# Altium PCB PCB.PcbDoc
Units mm, origin at the board's own origin, x right, y up, seen from the top; angles counter-clockwise.
Board outline 75.31 x 50.01 mm, 2 copper layers (Top Layer, Bottom Layer); 115 components, 77 nets, 388 pads, 0 vias.
Unrouted connection lines stored in the file: 250.
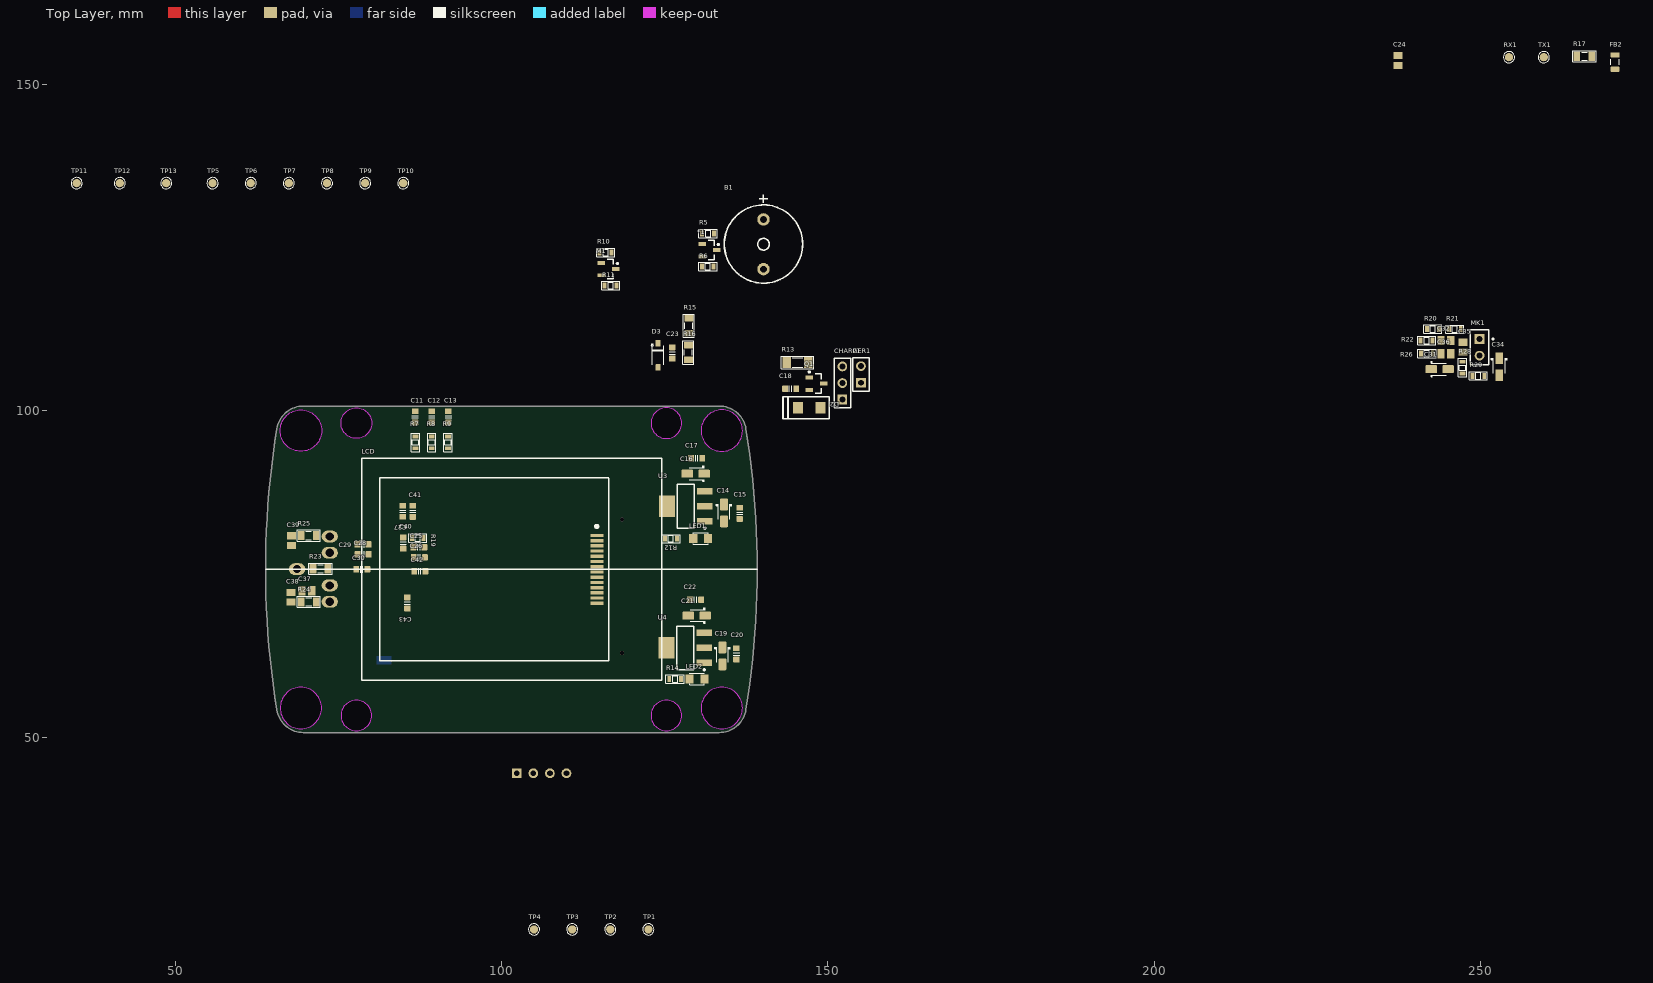
[diagram p0: Top Layer view]
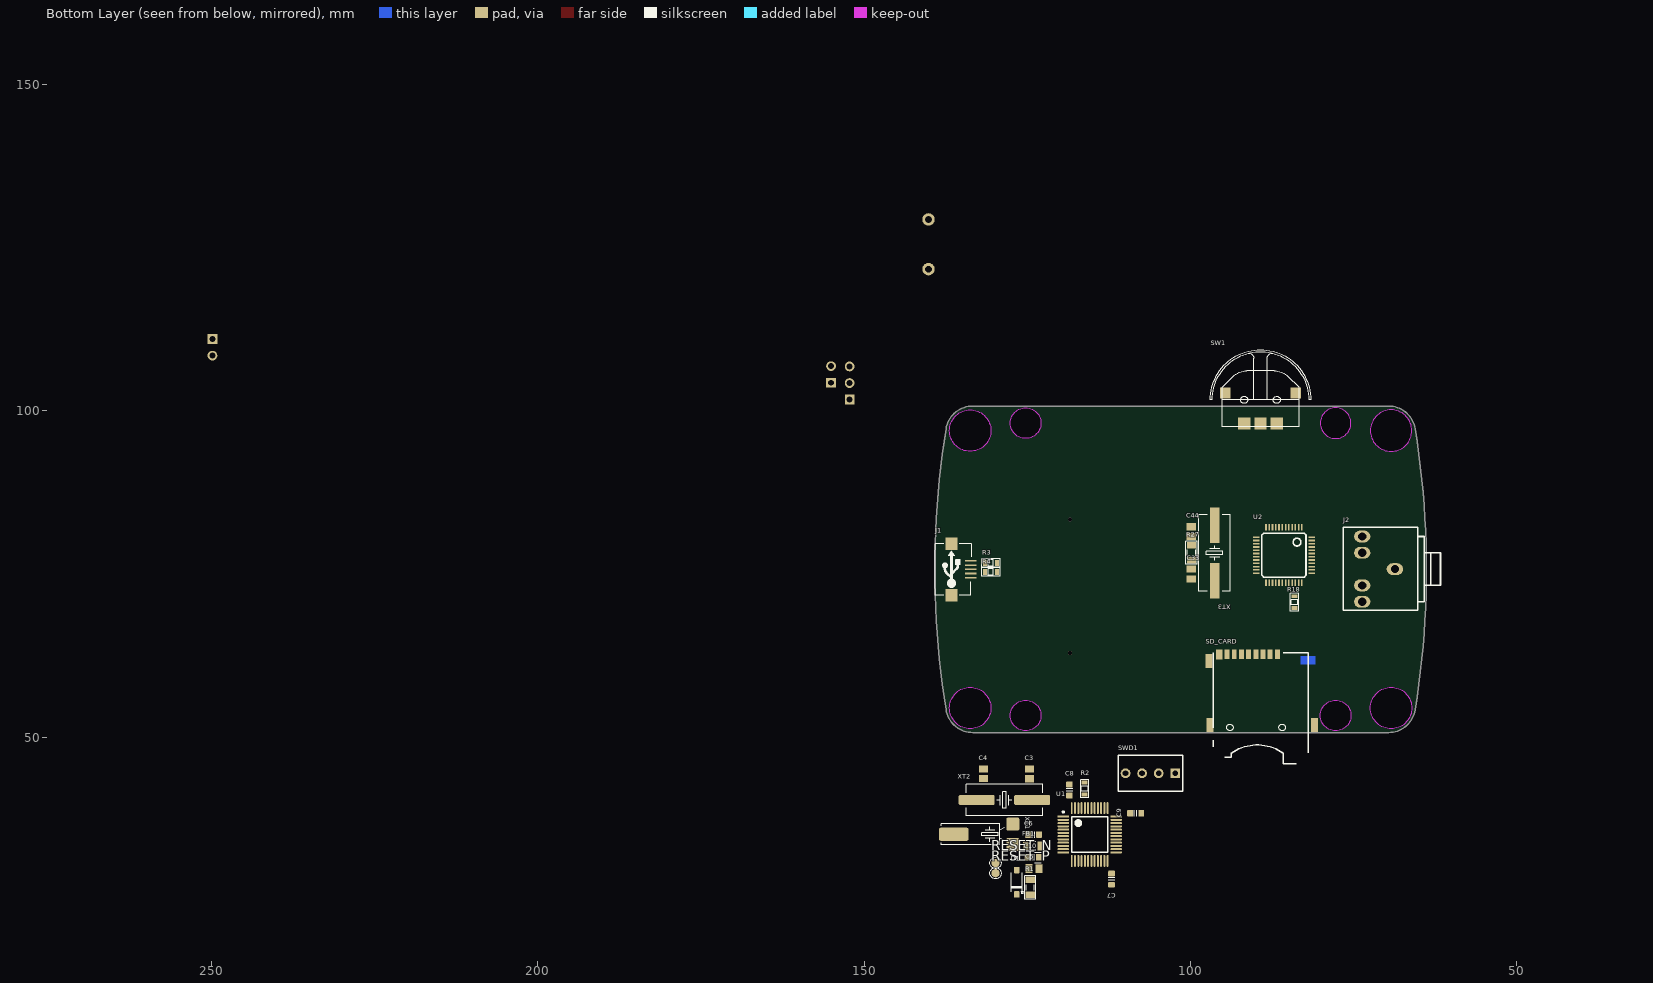
[diagram p1: Bottom Layer view, seen from below]

## Layer stack, top to bottom
Top Solder: solder mask 0.0102, Solder Resist, Dk 3.5
Top Layer: signal copper 0.0356
Dielectric 1: dielectric 0.32, FR-4, Dk 4.8
Bottom Layer: signal copper 0.0356
Bottom Solder: solder mask 0.0102, Solder Resist, Dk 3.5

## Board outline
69.673,50.697 75.401,50.697 98.596,50.697 104.395,50.697 124.324,50.697 133.388,50.696 ccw(c133.387,54.839) 137.477,54.184 ccw(c2.942,75.705) 137.477,97.224 ccw(c133.387,96.568) 133.388,100.711 127.665,100.71 104.468,100.71 98.669,100.71 75.472,100.71 69.673,100.711 ccw(c69.674,96.569) 65.585,97.224 ccw(c200.077,75.704) 65.584,54.188 ccw(c69.674,54.838)
cut-out: 69.281,93.779 cw(c69.281,96.954) 66.106,96.954 cw(c69.281,96.954) 69.281,100.129 cw(c69.281,96.954) 72.456,96.954 cw(c69.281,96.954)
cut-out: 75.431,53.304 ccw(c77.781,53.304) 77.781,50.954 ccw(c77.781,53.304) 80.131,53.304 ccw(c77.781,53.304) 77.781,55.654 ccw(c77.781,53.304)
cut-out: 66.106,54.454 ccw(c69.281,54.454) 69.281,51.279 ccw(c69.281,54.454) 72.456,54.454 ccw(c69.281,54.454) 69.281,57.629 ccw(c69.281,54.454)
cut-out: 122.931,53.304 ccw(c125.281,53.304) 125.281,50.954 ccw(c125.281,53.304) 127.631,53.304 ccw(c125.281,53.304) 125.281,55.654 ccw(c125.281,53.304)
cut-out: 130.606,54.454 ccw(c133.781,54.454) 133.781,51.279 ccw(c133.781,54.454) 136.956,54.454 ccw(c133.781,54.454) 133.781,57.629 ccw(c133.781,54.454)
cut-out: 130.606,96.954 ccw(c133.781,96.954) 133.781,93.779 ccw(c133.781,96.954) 136.956,96.954 ccw(c133.781,96.954) 133.781,100.129 ccw(c133.781,96.954)
cut-out: 122.931,98.104 ccw(c125.281,98.104) 125.281,95.754 ccw(c125.281,98.104) 127.631,98.104 ccw(c125.281,98.104) 125.281,100.454 ccw(c125.281,98.104)
cut-out: 77.781,95.754 cw(c77.781,98.104) 75.431,98.104 cw(c77.781,98.104) 77.781,100.454 cw(c77.781,98.104) 80.131,98.104 cw(c77.781,98.104)

## Design rules (kind name [scope] priority, off if disabled: settings)
Clearance [All] p1: gap=0.1
ComponentClearance [All] p1 off: gap=0.254 collisioncheckmode=3 verticalgap=0.254 showdistances=FALSE
Height [All] p1 off: minheight=0 maxheight=25.4 prefheight=12.7
PolygonConnect [All] p1: connectstyle=Relief reliefconductorwidth=0.254 reliefentries=4 polygonreliefangle="90 Angle" airgapwidth=0.254
RoutingVias [All] p1: holewidth=0.711 width=1.27 viastyle="Through Hole" minholewidth=0.711 minwidth=1.27 maxholewidth=0.711 maxwidth=1.27
SolderMaskExpansion [All] p1: expansion=0.102
Width [All] p1: maxlimit=0.254 minlimit=0.254 preferedwidth=0.254
28 further rules are at their usual default settings.

## Classes and differential pairs
component class vs1003: C24 C25 C26 C27 C28 C29 C30 C31 C32 C33 C34 C35 C36 C37 C38 C39 C40 C41 C42 C43 C44 FB2 J2 MK1 R17 R18 R19 R20 R21 R22 R23 R24 R25 R26 R27 R28 R29 RX1 TX1 U2 XT3
component class psu: C14 C15 C16 C17 C18 C19 C20 C21 C22 C23 CHARGER1 D2 D3 LED1 LED2 P1 Q1 R12 R13 R14 R15 R16 TP5 TP6 TP7 TP8 TP9 TP10 TP11 TP12 TP13 U3 U4
component class multimedia: *1 B1 C11 C12 C13 LCD M1 R5 R6 R7 R8 R9 R10 R11 SD_CARD SW1
component class mcu: C3 C4 C5 C6 C7 C8 C9 C10 D1 FB1 J1 R1 R2 R3 R4 RESET_N RESET_P SWD1 TP1 TP2 TP3 TP4 U1 XT1 XT2

## Components (designator, comment, footprint, x,y, rotation, side; value= is the part's Value field where it differs from the comment)
*1 "2n7002" SOT23_N 131.89,124.61 r0 top
B1 "Buzzer" Buzzer1 140.16,129.31 r270 top
C3 "Cap Semi" C0805 124.7,44.36 r270 bottom
C4 "Cap Semi" C0805 131.74,44.38 r270 bottom
C5 "Cap Semi" C0805 123.99,29.86 r180 bottom
C6 "approved sub OK" CAPC1608X90N 124.07,35.05 r0 bottom
C7 "approved sub OK" CAPC1608X90N 112.12,28.23 r270 bottom
C8 "approved sub OK" CAPC1608X90N 118.57,41.9 r90 bottom
C9 "approved sub OK" CAPC1608X90N 108.42,38.34 r180 bottom
C10 "approved sub OK" CAPC1608X90N 124.12,31.59 r180 bottom
C11 "Cap Semi" CAPC1608X90N 86.77,99.07 r270 top
C12 "Cap Semi" CAPC1608X90N 89.33,99.07 r270 top
C13 "Cap Semi" CAPC1608X90N 91.89,99.07 r270 top
C14 "10µ" CAPMP3216X180N 134.11,84.34 r270 top
C15 "Cap Semi" CAPC1608X90N 136.5,84.28 r90 top
C16 "10µ" CAPMP3216X180N 129.77,90.36 r180 top
C17 "Cap Semi" CAPC1608X90N 129.926,92.704 r0 top
C18 "Cap Semi" CAPC1608X90N 144.32,103.35 r0 top
C19 "10µ" CAPMP3216X180N 133.86,62.436 r270 top
C20 "Cap Semi" CAPC1608X90N 136.01,62.75 r90 top
C21 "10µ" CAPMP3216X180N 129.93,68.62 r180 top
C22 "Cap Semi" CAPC1608X90N 129.75,71.04 r0 top
C23 "Cap Semi" CAPC1608X90N 126.186,108.846 r90 top
C24 "Cap Semi" C0805 237.363,153.67 r90 top
C25 "approved sub OK" CAPC1608X90N 87.36,79.08 r180 top
C26 "approved sub OK" CAPC1608X90N 87.42,77.52 r180 top
C27 "approved sub OK" CAPC1608X90N 84.89,84.6 r90 top
C28 "approved sub OK" CAPC1608X90N 78.81,78.01 r180 top
C29 "approved sub OK" CAPC1608X90N 78.8,79.52 r180 top
C30 "approved sub OK" CAPC1608X90N 78.61,75.69 r180 top
C31 "10µ" CAPMP3216X180N 243.76,106.37 r0 top
C32 "Cap Semi" C0805 244.72,110.78 r0 top
C33 "Cap Semi" C0805 99.9,74.98 r90 bottom
C34 "10µ" CAPMP3216X180N 252.89,106.73 r270 top
C35 "Cap Semi" C0805 247.31,109.73 r90 top
C36 "Cap Semi" C0805 244.71,108.74 r0 top
C37 "Cap Semi" C0805 70.19,72.42 r0 top
C38 "Cap Semi" C0805 67.79,71.42 r270 top
C39 "Cap Semi" C0805 67.84,80.09 r90 top
C40 "approved sub OK" CAPC1608X90N 84.96,79.73 r270 top
C41 "approved sub OK" CAPC1608X90N 86.43,84.59 r90 top
C42 "approved sub OK" CAPC1608X90N 87.5,75.4 r180 top
C43 "approved sub OK" CAPC1608X90N 85.59,70.56 r270 top
C44 "Cap Semi" C0805 99.91,81.48 r270 bottom
CHARGER1 "3-Pin connector" HDR1X3 152.24,101.7 r90 top
D1 "DIODE_SCHOTTKY_40V_1A" SOD123 126.635,27.75 r90 bottom
D2 "Diode" "SMD Diode" 147.19,100.45 r0 top
D3 "DIODE_SCHOTTKY_40V_1A" SOD123 124,108.48 r270 top
FB1 "2K2 @ 100 MHz" FBC2012N 124.17,33.32 r180 bottom
FB2 "2K2 @ 100 MHz" FBC2012N 270.637,153.416 r90 top
J1 "USB-5" USB-M1 133.67,75.7 r90 bottom
J2 "Jack Stereo 5pin" "Audio Jack 5 pin" 71.501,75.736 r270 bottom locked
LCD "LCD_JD-T1800" JD-T1800 124.584,58.694 r90 top locked
LED1 "LED" LED-0805-Red 129.384,80.4 r0 top
LED2 "LED" LED-0805-Red 128.83,58.91 r0 top
M1 "2n7002" SOT23_N 116.42,121.71 r0 top
MK1 "Mic2" PIN2 249.88,110.98 r270 top
P1 "BAT_CON" HDR1X2 155.09,104.29 r90 top
Q1 "IRLML6402" SOT-23B_N 148.3,104.15 r0 top
R1 "Res" RES-SMD-0805 124.575,26.96 r90 bottom
R2 "Res" RES-SMD-0603 116.23,42.08 r90 bottom
R3 "Res" RES-SMD-0603 130.6,76.65 r180 bottom
R4 "Res" RES-SMD-0603 130.6,75.27 r180 bottom
R5 "Res" RES-SMD-0603 131.66,127.16 r180 top
R6 "Res" RES-SMD-0603 131.64,122.08 r180 top
R7 "Res" RES-SMD-0603 86.84,95.14 r90 top
R8 "Res" RES-SMD-0603 89.335,95.14 r90 top
R9 "Res" RES-SMD-0603 91.83,95.14 r90 top
R10 "Res" RES-SMD-0603 115.99,124.24 r180 top
R11 "Res" RES-SMD-0603 116.75,119.17 r180 top
R12 "Res" RES-SMD-0603 125.98,80.4 r0 top
R13 "Res" RES-SMD-1206 145.38,107.39 r180 top
R14 "Res" RES-SMD-0603 126.61,58.89 r0 top
R15 "Res" RES-SMD-0805 128.72,113.02 r270 top
R16 "Res" RES-SMD-0805 128.64,108.92 r270 top
R17 "Res" RES-SMD-0805 265.938,154.305 r0 top
R18 "Res" RES-SMD-0603 84.07,70.65 r90 bottom
R19 "Res" RES-SMD-0603 87.17,80.48 r0 top
R20 "Res" RES-SMD-0603 242.72,112.51 r0 top
R21 "Res" RES-SMD-0603 246.06,112.5 r0 top
R22 "Res" RES-SMD-0603 241.78,110.77 r180 top
R23 "Res" RES-SMD-0805 72.28,75.78 r180 top
R24 "Res" RES-SMD-0805 70.49,70.72 r180 top
R25 "Res" RES-SMD-0805 70.47,80.87 r180 top
R26 "Res" RES-SMD-0603 241.81,108.78 r180 top
R27 "Res" RES-SMD-0805 99.87,78.23 r90 bottom
R28 "Res" RES-SMD-0603 247.25,106.62 r270 top
R29 "Res" RES-SMD-0603 249.67,105.35 r0 top
RESET_N "TESTPOINT" TP-R60 129.89,30.71 r90 bottom
RESET_P "TESTPOINT" TP-R60 129.89,29.14 r90 bottom
RX1 "TESTPOINT" TP-R60 254.381,154.178 r0 top
SD_CARD "USD-SOCKETUSD" MICROSD-CARD 89.783,45.89 r180 bottom locked
SW1 "Navigation Switch" "Navigation Switch" 91.79,98.06 r180 bottom locked
SWD1 "Header4" HDR4 102.35,44.45 r0 bottom
TP1 "TESTPOINT" TP-R60 122.525,20.53 r0 top
TP2 "TESTPOINT" TP-R60 116.683,20.53 r90 top
TP3 "TESTPOINT" TP-R60 110.841,20.53 r90 top
TP4 "TESTPOINT" TP-R60 104.999,20.53 r90 top
TP5 "TESTPOINT" TP-R60 55.753,134.874 r90 top
TP6 "TESTPOINT" TP-R60 61.595,134.874 r90 top
TP7 "TESTPOINT" TP-R60 67.437,134.874 r90 top
TP8 "TESTPOINT" TP-R60 73.279,134.874 r90 top
TP9 "TESTPOINT" TP-R60 79.121,134.874 r90 top
TP10 "TESTPOINT" TP-R60 84.963,134.874 r90 top
TP11 "TESTPOINT" TP-R60 34.925,134.874 r90 top
TP12 "TESTPOINT" TP-R60 41.529,134.874 r90 top
TP13 "TESTPOINT" TP-R60 48.641,134.874 r90 top
TX1 "TESTPOINT" TP-R60 259.715,154.178 r0 top
U1 "STM32F103C8T6" LQFP48_N 115.46,35.07 r180 bottom
U2 "VS1003-LQFP48" LQFP48 85.7,77.87 r0 bottom
U3 "LM1117-3.3V" SOT230P700X180-4N 128.27,85.36 r180 top
U4 "LM1117-2.5V" SOT230P700X180-4N 128.19,63.666 r180 top
XT1 "32,768 KHz" CRYSTAL_CMR309T 129.24,35.11 r180 bottom
XT2 "8.00MHz" CRYSTAL_HC49-US-SM 128.53,40.35 r180 bottom
XT3 "12.288MHz" CRYSTAL_HC49-US-SM 96.31,78.2 r270 bottom

## Footprints (in the part's own frame and the unit in brackets; to place one, negate y for a bottom-side part, rotate by r counter-clockwise, add the part's x,y. Pads: shape width x height; smd on the part's side, far side on the other; paste and mask are expansions set on the pad)
"Audio Jack 5 pin" [mm]
  oval 1.8x2.5 hole 1.25: 1(0,2.794) 2(5,-2.206) 3(-5,-2.206) 4(2.5,-2.206) 5(-2.5,-2.206)
  silkscreen extent -6.4,-5.13 6.3,9.79, body extent -6,-4.98 6,9.07, height 5.5
Buzzer1 [mil]
  round 75 hole 40: 1(0,0) 2(300,0)
  silkscreen extent -150,-236 385,236
C0805 [mm] "Chip Capacitor, Body 2.0x1.3mm, IPC High Density"
  rect 1.1x1.4 smd: 1(-0.75,0) 2(0.75,0)
  body extent -1.1,-0.72 1.1,0.72, height 1.4
CAPC1608X90N [mm] "Chip Capacitor, Body 1.6x0.8mm, EIA 0603, IPC Medium Density"
  round 0.254 on Mech15: 0(0,0)
  rrect25% 0.9x1 smd: 1(-0.85,0) 2(0.85,0)
  Top Layer pour cut-out: -0.6,0.5 -0.4,0.7 0.4,0.7 0.6,0.5 0.6,-0.5 0.4,-0.7 -0.4,-0.7 -0.6,-0.5
  silkscreen extent -0.18,-0.48 0.18,0.48, body extent -0.85,-0.45 0.85,0.45, height 0.89
CAPMP3216X180N [mm] "Capacitor, polarized, Molded Body, EIA 535BAAC size A; 3.20mm L X 1.60mm W X 1.80mm H"
  round 0.508 on Mech15: 0(0,0)
  rrect25% 1.8x1.2 smd: 1(-1.3,0) 2(1.3,0)
  silkscreen extent -1.3,-1.2 1,1.2, body extent -1.6,-0.8 1.6,0.8, height 1.8
CRYSTAL_CMR309T [mm] "SMD Crystal CMR309T package"
  round 0.508 on Mech15: 0(0,0)
  rrect25% 2x2 smd: 1(2,-1.55) 2(2,1.55)
  rrect25% 4.5x2 smd: SH(-7.05,0)
  silkscreen extent -9,-1.6 0.72,1.6, body extent -9,-2.25 2.73,2.25, height 3.09
CRYSTAL_HC49-US-SM [mm] "SMD Crystal HC49/US-SM package"
  round 0.508 on Mech15: 0(0,0)
  rrect25% 5.5x1.5 smd: 1(-4.25,0) 2(4.25,0)
  silkscreen extent -5.84,-2.41 5.84,2.41, body extent -6.4,-2.41 6.4,2.42, height 4.29
FBC2012N [mm] "Ferrite Bead Chip, Body 2.0x1.2mm, 0805, IPC Medium Density"
  round 0.508 on Mech15: 0(0,0)
  rrect25% 0.8x1.35 smd: 1(-1.1,0) 2(1.1,0)
  silkscreen extent -0.43,-0.64 0.46,0.64, body extent -1,-0.62 1,0.63, height 0.9
HDR1X2 [mm] "Connector; Header; 2 Position"
  rect 1.5x1.5 hole 0.9: 1(0,0)
  round 1.5 hole 0.9: 2(2.54,0)
  silkscreen extent -1.27,-1.27 3.81,1.27
HDR1X3 [mm] "Connector; Header; 3 Position"
  rect 1.5x1.5 hole 0.9: 1(0,0)
  round 1.5 hole 0.9: 2(2.54,0) 3(5.08,0)
  silkscreen extent -1.27,-1.27 6.35,1.27
HDR4 [mm] "Connector; Header; 4 Position"
  rect 1.5x1.5 hole 0.9: 1(0,0)
  round 1.5 hole 0.9: 2(2.54,0) 3(5.08,0) 4(7.62,0)
  silkscreen extent -1.14,-2.79 8.76,2.74, body extent -1.27,-2.92 8.89,2.88, height 11.72
JD-T1800 [mm]
  round 0.6 hole 0.6: 1(4.2,6.1) 1(24.65,6.1)
  rect 0.5x2 smd: 1(22.2,9.9) 2(21.4,9.9) 3(20.6,9.9) 4(19.8,9.9) 5(19,9.9) 6(18.2,9.9) 7(17.4,9.9) 8(16.6,9.9) 9(15.8,9.9) 10(15,9.9) 11(14.2,9.9) 12(13.4,9.9) 13(12.6,9.9) 14(11.8,9.9)
  silkscreen extent 0,0 34,46
LED-0805-Red [mil]
  rect 50x55 smd: 1(0,0) 2(90,0)
  silkscreen extent 0,-35 90,35, body extent 5,-25 85,25, height 43
LQFP48 [mm]
  rect 0.25x1 smd: 1(-2.75,-4.25) 2(-2.25,-4.25) 3(-1.75,-4.25) 4(-1.25,-4.25) 5(-0.75,-4.25) 6(-0.25,-4.25) 7(0.25,-4.25) 8(0.75,-4.25) 9(1.25,-4.25) 10(1.75,-4.25) 11(2.25,-4.25) 12(2.75,-4.25) 25(2.75,4.25) 26(2.25,4.25) 27(1.75,4.25) 28(1.25,4.25) 29(0.75,4.25) 30(0.25,4.25) 31(-0.25,4.25) 32(-0.75,4.25) 33(-1.25,4.25) 34(-1.75,4.25) 35(-2.25,4.25) 36(-2.75,4.25)
  rect 1x0.25 smd: 13(4.25,-2.75) 14(4.25,-2.25) 15(4.25,-1.75) 16(4.25,-1.25) 17(4.25,-0.75) 18(4.25,-0.25) 19(4.25,0.25) 20(4.25,0.75) 21(4.25,1.25) 22(4.25,1.75) 23(4.25,2.25) 24(4.25,2.75) 37(-4.25,2.75) 38(-4.25,2.25) 39(-4.25,1.75) 40(-4.25,1.25) 41(-4.25,0.75) 42(-4.25,0.25) 43(-4.25,-0.25) 44(-4.25,-0.75) 45(-4.25,-1.25) 46(-4.25,-1.75) 47(-4.25,-2.25) 48(-4.25,-2.75)
  silkscreen extent -3.37,-3.37 3.37,3.37
LQFP48_N [mm] "Thin QFP, 48-Leads, Body 7x7mm, Pitch 0.5mm, IPC Medium Density"
  oval 1.8x0.3 smd: 1(-4.05,2.75) 2(-4.05,2.25) 3(-4.05,1.75) 4(-4.05,1.25) 5(-4.05,0.75) 6(-4.05,0.25) 7(-4.05,-0.25) 8(-4.05,-0.75) 9(-4.05,-1.25) 10(-4.05,-1.75) 11(-4.05,-2.25) 12(-4.05,-2.75) 25(4.05,-2.75) 26(4.05,-2.25) 27(4.05,-1.75) 28(4.05,-1.25) 29(4.05,-0.75) 30(4.05,-0.25) 31(4.05,0.25) 32(4.05,0.75) 33(4.05,1.25) 34(4.05,1.75) 35(4.05,2.25) 36(4.05,2.75)
  oval 0.3x1.8 smd: 13(-2.75,-4.05) 14(-2.25,-4.05) 15(-1.75,-4.05) 16(-1.25,-4.05) 17(-0.75,-4.05) 18(-0.25,-4.05) 19(0.25,-4.05) 20(0.75,-4.05) 21(1.25,-4.05) 22(1.75,-4.05) 23(2.25,-4.05) 24(2.75,-4.05) 37(2.75,4.05) 38(2.25,4.05) 39(1.75,4.05) 40(1.25,4.05) 41(0.75,4.05) 42(0.25,4.05) 43(-0.25,4.05) 44(-0.75,4.05) 45(-1.25,4.05) 46(-1.75,4.05) 47(-2.25,4.05) 48(-2.75,4.05)
  silkscreen extent -4.18,-2.75 2.75,3.57, body extent -3.5,-3.5 3.5,3.5, height 1.6
MICROSD-CARD [mil]
  rect 29.53x59.06 smd: 1(120.98,661.42) 2(77.68,661.42) 3(34.37,661.42) 4(-8.94,661.42) 5(-52.24,661.42) 6(-95.55,661.42) 7(-138.86,661.42) 8(-182.17,661.42)
  rect 39.37x59.06 smd: 9(-230.32,659.45)
  rect 42.01x85.98 smd: GND1(-285,235) GND2(345,235)
  rect 42x86 smd: GND3(-290,620)
  Top Layer region: 260,650 350,650 350,600 260,600
  silkscreen extent -265,0 308,669, body extent -287,-12 347,665, height 87
"Navigation Switch" [mm]
  rect 1.9x1.8 smd: 1(0,0) 2(2.5,0) 3(5,0)
  rect 1.6x1.7 smd: 4(-2.9,4.65) 5(7.9,4.65)
  silkscreen extent -5.2,-0.5 10.2,11.3
PIN2 [mm] "Photosensitive Diode; 2 Leads"
  rect 1.5x1.5 hole 0.9: 1(0,0)
  round 1.5 hole 0.9: 2(2.54,0)
  silkscreen extent -1.4,-1.4 3.94,2.18
RES-SMD-0603 [mm]
  rect 0.6x0.9 smd: 1(-0.889,0) 2(0.927,0)
  silkscreen extent -1.4,-0.64 1.4,0.64, body extent -0.8,-0.4 0.8,0.4, height 0.43
RES-SMD-0805 [mil]
  rect 39.37x55 smd: 1(-45,0) 2(45,0)
  silkscreen extent -70,-34 70,33, body extent -39,-25 39,25, height 31
RES-SMD-1206 [mil]
  rect 50x65 smd: 1(-65,0) 2(65,0)
  silkscreen extent -99,-38 99,39, body extent -63,-31 63,32, height 40
"SMD Diode" [mm] "1A, 40V Shottky diode, SS14"
  rect 1.55x1.7 smd: 1(1.725,0) 2(-1.725,0)
  silkscreen extent -4.05,-1.7 3.03,1.7
SOD123 [mm] "SOD-123; 2 Leads; Body 2.7 x 1.6 mm, (LxW)"
  round 0.508 on Mech15: 0(0,0)
  rrect25% 1x0.8 smd: A(1.85,0) K(-1.85,0)
  silkscreen extent -1.75,-1 1.45,0.85, body extent -1.95,-0.9 1.95,0.9, height 1.18
SOT23_N [mm] "SOT23, 3-Leads, Body 2.9x1.3mm, Pitch 0.95mm, Lead Span 2.3mm - Reverse Pinning, IPC Medium Density"
  rect 1.15x0.6 smd: 1(1.125,0) 2(-1.125,-0.95) 3(-1.125,0.95)
  silkscreen extent -0.2,-1.5 1.48,1.5, body extent -0.7,-1.5 0.7,1.5, height 1.1
SOT230P700X180-4N [mm] "SOT223, 4-Leads, Body 6.7x7.3mm (max), Pitch 2.30mm, IPC Medium Density"
  rect 2.4x1 smd: 1(-2.9,2.3) 2(-2.9,0) 3(-2.9,-2.3)
  rect 2.4x3.3 smd: 4(2.9,0)
  silkscreen extent -3.03,-3.35 1.3,3.47, body extent -3.54,-3.2 3.46,3.3, height 1.6
SOT-23B_N [mm] "SOT23, 3-Leads, Body 2.9x1.3mm, Pitch 0.95mm, Lead Span 2.4mm, IPC Medium Density"
  rect 1.15x0.6 smd: 1(-1.125,0.95) 2(-1.125,-0.95) 3(1.125,0)
  silkscreen extent -1.25,-1.5 0.7,1.92, body extent -0.7,-1.5 0.7,1.5, height 1.14
TP-R60 [mm]
  round 1.27 smd paste-1.27: 1(0,0)
  silkscreen extent -0.86,-0.86 0.86,0.86, body extent -0.76,-0.76 0.76,0.76, height 0.25
USB-M1 [mil]
  rect 10x70 smd: 1(51.18,0) 2(25.59,0) 3(0,0) 4(-25.59,0) 5(-50,0)
  rect 74.8x74.8 smd: 5(-155.51,116.84) 5(155.51,116.84)
  silkscreen extent -155,-1 155,215, body extent -157,5 158,218, height 107

## Part data
C3 C4 C5 C11 C12 C13 C15 C17 C18 C20 C22 C23 C24 C32 C33 C35 C36 C37 C38 C39 C44: "Capacitor (Semiconductor SIM Model)"
C6 C7 C8 C9 C10 C25 C26 C27 C28 C29 C30 C40 C41 C42 C43: library part CAPC_100n_0603_X7R_50V_10%, "Capacitor SMD Cer 100nF 10% 50V X7R 0603"
C14 C16 C19 C21 C31 C34: library part CAPT_68u_3216_6V3, "Capacitor SMD Tantalum 68uF 10% 6.3V EIA 3216-18"
CHARGER1: library part "Header 3"
D1 D3: "Diode Schottky SMD 40V 1A SOD123"
D2: "SS14, Schottky Diode"
FB1 FB2: library part FERRITE_2K2-100MHz_0805, "Ferrite bead 2.2K Ohm at 100 MHz 200mA 0805 SMD"
J2: "3-Conductor Jack with 2 break contacts (normals) and 2 auxiliary make contacts"
LED1 LED2: library part "LED SMD"
MK1: "Microphone"
P1: library part "Header 2", "Header, 2-Pin"
R1 R2 R3 R4 R5 R6 R7 R8 R9 R10 R11 R12 R13 R14 R15 R16 R17 R18 R19 R20 R21 R22 R23 R24 R25 R26 R27 R28 R29: library part Res-SMD, "Resistor"
RESET_N RESET_P RX1 TP1 TP2 TP3 TP4 TP5 TP6 TP7 TP8 TP9 TP10 TP11 TP12 TP13 TX1: "SMD test pin"
SD_CARD: "microSD SocketPush-push type uSD socket. Schematic element and footprint production proven. Spark Fun Electronics SKU : PRT-00127. tDoc lines correctly indicate media card edge positions when inserting (unlocked, locked, depressed). NOTE: CD1 and CD2 are connected internally"
SWD1: "Header IDC, 4 x 1 Pin Vertical 2.54mm Pitch (Non-Boxed, Male)"
U1: "STM32 ARM-based 32-bit MCU with 64 Kbytes Flash, 48-pin LQFP, Industrial Temperature"
U2: "MP3/WMA Audio Codec   http://www.vlsi.fi/fileadmin/datasheets/vlsi/vs1003.pdf"
U3 U4: library part LM1117-4N
XT1: library part Crystal_6MHz_CMR309T, "Resonator Ceramic 6.00 MHz 30ppm"
XT2 XT3: library part Crystal_6MHz_HC49/US, "Resonator Ceramic 6.00 MHz 30ppm"

## Nets (pads, with @x,y where several pads share a name; then routed paths per layer and width w, separated by ;. In a path a pad name is that pad's centre, name@x,y a point inside that pad or via, vN(x,y) a via of type N, cw(c..) or ccw(c..) an arc to the next point about the centre after c; other vN are vias at no path point)
2.5V: C19.1 C20.2 C40.1 C41.1 C42.1 C43.1 R14.1 TP6.1 U2.5 U2.7 U2.24 U2.31 U4.2 U4.4
3.3V: B1.1 C7.1 C8.1 C9.1 C10.1 C14.1 C15.2 C25.1 C26.1 C27.1 D1.K FB1.1 FB2.1 LCD.4 LCD.10 LCD.11 R1.1 R7.1 R8.1 R9.1 R12.1 R17.1 SD_CARD.4 SWD1.1 TP7.1 U1.24 U1.36 U1.48 U2.6 U2.14 U2.19 U2.32 U3.2 U3.4
ADC_0: C23.2 D3.K R15.2 R16.1 U1.10
AGND: C6.2 C23.1 D3.A R16.2 TP12.1 U1.8
AVDD: C28.1 C29.1 C30.1 FB2.2 R20.1 TP9.1 U2.38 U2.43 U2.45
BOOT0: R2.1 U1.44
BUZZER: *1.1 R6.1 U1.31
CHARGER_OUTPUT: CHARGER1.2 P1.1 Q1.3 R15.1 TP8.1 U1.1
D+: R4.2 U1.33
D-: R3.2 U1.32
DREQ: U1.25 U2.8
GBUFF: J2.1 R23.1 U2.42
GND: *1.2 C3.1 C4.1 C5.1 C7.2 C8.2 C9.2 C10.2 C11.1 C12.1 C13.1 C14.2 C15.1 C16.2 C17.1 C18.1 C19.2 C20.1 C21.2 C22.1 C24.1 C25.2 C26.2 C27.2 C33.1 C40.2 C41.2 C42.2 C43.2 C44.1 CHARGER1.3 J1.5 LCD.2 LCD.5 LCD.13 LED1.2 LED2.2 M1.2 P1.2 R2.2 R6.2 R11.2 R13.2 R18.1 R19.1 RESET_N.1 SD_CARD.6 SW1.5 SWD1.4 TP11.1 U1.23 U1.35 U1.47 U3.1 U4.1
LCD_BL: M1.1 R11.1 U1.30
LCD_CS: LCD.12 U1.14
LCD_RS: LCD.7 U1.11
LCD_RST: LCD.6 U1.20
LCD_SCK: LCD.9 U1.13
LCD_SDA: LCD.8 U1.12
LED-: LCD.3 R10.1
LEFT: J2.3 R25.1 U2.46
MICN: R26.2 U2.2
MICP: R22.2 U2.1
MISO: U1.27 U2.30
MOSI: U1.28 U2.29
Net*1_3: *1.3 R5.2
NetB1_2: B1.2 R5.1
NetC3_2: C3.2 U1.3 XT2.2
NetC4_2: C4.2 U1.4 XT2.1
NetC6_1: C6.1 FB1.2 U1.9
NetC24_2: C24.2 U2.44
NetC31_1: C31.1 C34.1 R20.2 R21.1
NetC31_2: C31.2 R28.2 R29.1
NetC32_1: C32.1 R22.1
NetC32_2: C32.2 C35.2 MK1.1 R21.2
NetC33_2: C33.2 R27.1 U2.18 XT3.2
NetC35_1: C35.1 C36.2 MK1.2 R28.1
NetC36_1: C36.1 R26.1
NetC37_2: C37.2 R23.2
NetC38_2: C38.2 R24.2
NetC39_2: C39.2 R25.2
NetC44_2: C44.2 R27.2 U2.17 XT3.1
NetJ1_2: J1.2 R3.1
NetJ1_3: J1.3 R4.1
NetLED1_1: LED1.1 R12.2
NetLED2_1: LED2.1 R14.2
NetM1_3: M1.3 R10.2
NetR17_2: R17.2 RX1.1 U2.26
NetR18_2: R18.2 U2.33 U2.34
NetR19_2: R19.2 U2.9 U2.10
NetTX1_1: TX1.1 U2.27
NetU1_5: U1.5 XT1.2
NetU1_6: U1.6 XT1.1
NetU2_4: U2.4 U2.16 U2.20 U2.21 U2.22
PB3: TP3.1 U1.39
PB4: TP4.1 U1.40
PB8: TP1.1 U1.45
PB9: TP2.1 U1.46
RIGHT: J2.2 R24.1 U2.39
RST: C5.2 D1.A R1.2 RESET_P.1 U1.7
SCK: U1.26 U2.28
SD_CD: SD_CARD.9 U1.18
SD_CS: SD_CARD.2 U1.19
SD_MISO: SD_CARD.7 U1.16
SD_MOSI: SD_CARD.3 U1.17
SD_SCK: SD_CARD.5 U1.15
SW_L: C11.2 R7.2 SW1.3 U1.43
SW_M: C12.2 R8.2 SW1.2 U1.42
SW_R: C13.2 R9.2 SW1.1 U1.41
SWCLK: SWD1.3 U1.37
SWDIO: SWD1.2 U1.34
VIN: C16.1 C17.2 C18.2 C21.1 C22.2 D2.2 Q1.2 TP5.1 U3.3 U4.3
VS_AGND: C28.2 C29.2 C30.2 C34.2 C37.1 C38.1 C39.1 R29.2 TP13.1 U2.37 U2.40 U2.41 U2.47
VUSB: CHARGER1.1 D2.1 J1.1 Q1.1 R13.1 TP10.1
XCS: U1.21 U2.23
XDCS: U1.22 U2.13
XRST: U1.29 U2.3
pads on no net: C6.0 C7.0 C8.0 C9.0 C10.0 C11.0 C12.0 C13.0 C14.0 C15.0 C16.0 C17.0 C18.0 C19.0 C20.0 C21.0 C22.0 C23.0 C25.0 C26.0 C27.0 C28.0 C29.0 C30.0 C31.0 C34.0 C40.0 C41.0 C42.0 C43.0 D1.0 D3.0 FB1.0 FB2.0 J1.4 J2.4 J2.5 LCD.1 LCD.14 SD_CARD.1 SD_CARD.8 SD_CARD.GND1 SD_CARD.GND2 SD_CARD.GND3 SW1.4 U1.2 U1.38 U2.11 U2.12 U2.15 U2.25 U2.35 U2.36 U2.48 XT1.0 XT1.SH XT2.0 XT3.0

## Silkscreen, mask and mechanical layers (free items; w line width, h text height)
Top Overlay:
  lines w0.254: 63.881,75.692 139.192,75.692
Mechanical 1:
  circle w0.1: c77.781,98.104 r0.95
  circle w0.1: c77.781,98.104 r2.35
  circle w0.1: c77.781,53.304 r2.35
  circle w0.1: c125.281,53.304 r0.95
  circle w0.1: c125.281,98.104 r2.35
  circle w0.1: c125.281,53.304 r2.256
  circle w0.1: c125.281,53.304 r2.35
  circle w0.1: c125.281,98.104 r0.95
  circle w0.1: c125.281,98.104 r2.256
  circle w0.1: c77.781,53.304 r0.95
  circle w0.1: c77.781,53.304 r2.256
  circle w0.1: c133.781,54.454 r3.175
  circle w0.1: c133.781,96.954 r3.175
  circle w0.1: c69.281,54.454 r3.175
  circle w0.1: c69.281,96.954 r3.175
  circle w0.1: c133.781,96.954 r1.2
  circle w0.1: c133.781,96.954 r2.926
  circle w0.1: c69.281,54.454 r1.2
  circle w0.1: c69.281,54.454 r2.926
  circle w0.1: c133.781,54.454 r1.2
  circle w0.1: c133.781,54.454 r2.926
  circle w0.1: c69.281,96.954 r1.2
  circle w0.1: c69.281,96.954 r2.926
  pour cut-out: 75.431,53.304 ccw(c77.781,53.304) 77.781,50.954 ccw(c77.781,53.304) 80.131,53.304 ccw(c77.781,53.304) 77.781,55.654 ccw(c77.781,53.304)
  pour cut-out: 69.281,51.279 ccw(c69.281,54.454) 72.456,54.454 ccw(c69.281,54.454) 69.281,57.629 ccw(c69.281,54.454) 66.106,54.454 ccw(c69.281,54.454)
  pour cut-out: 66.106,54.454 ccw(c69.281,54.454) 69.281,51.279 ccw(c69.281,54.454) 72.456,54.454 ccw(c69.281,54.454) 69.281,57.629 ccw(c69.281,54.454)
  pour cut-out: 130.606,54.454 ccw(c133.781,54.454) 133.781,51.279 ccw(c133.781,54.454) 136.956,54.454 ccw(c133.781,54.454) 133.781,57.629 ccw(c133.781,54.454)
  lines w0.1: 65.584,54.188 cw(c200.077,75.704) 65.585,97.224 cw(c69.674,96.569) 69.673,100.711 75.472,100.71 98.669,100.71 104.468,100.71 127.665,100.71 133.388,100.711 cw(c133.387,96.568) 137.477,97.224 cw(c2.942,75.705) 137.477,54.184 cw(c133.387,54.839) 133.388,50.696 124.324,50.697 104.395,50.697 98.596,50.697 75.401,50.697 69.673,50.697 cw(c69.674,54.838) 65.584,54.188
  text "TOP" at 72.39,98.933 h0.7
Mechanical 3:
  region: 52.576,54.454 52.068,57.756 53.084,57.756
  region: 53.084,93.652 52.068,93.652 52.576,96.954
  region: 88.072,53.304 87.564,56.606 88.58,56.606
  region: 88.58,94.802 87.564,94.802 88.072,98.104
  region: 81.083,109.185 77.781,109.693 81.083,110.201
  region: 125.281,109.693 121.979,109.185 121.979,110.201
  lines w0.013: 51.576,54.454 68.281,54.454 ; 51.576,96.954 68.281,96.954 ; 52.576,54.454 52.576,96.954 ; 65.581,54.454 66.781,54.454 69.281,54.454 ; 65.581,96.954 66.781,96.954 69.281,96.954 ; 69.281,50.754 69.281,51.954 69.281,54.454 ; 69.281,58.154 69.281,56.954 69.281,54.454 ; 69.281,93.254 69.281,94.454 69.281,96.954 ; 69.281,100.654 69.281,99.454 69.281,96.954 ; 69.281,117.668 133.781,117.668 ; 72.981,54.454 71.781,54.454 69.281,54.454 ; 72.981,96.954 71.781,96.954 69.281,96.954 ; 74.331,53.304 75.281,53.304 77.781,53.304 ; 74.331,98.104 75.281,98.104 77.781,98.104 ; 77.781,49.854 77.781,50.804 77.781,53.304 ; 77.781,56.754 77.781,55.804 77.781,53.304 ; 77.781,94.654 77.781,95.604 77.781,98.104 ; 77.781,99.104 77.781,110.693 ; 77.781,101.554 77.781,100.604 77.781,98.104 ; 77.781,109.693 125.281,109.693 ; 78.781,53.304 89.072,53.304 ; 78.781,98.104 89.072,98.104 ; 81.231,53.304 80.281,53.304 77.781,53.304 ; 81.231,98.104 80.281,98.104 77.781,98.104 ; 86.934,121.068 86.934,141.782 ; 88.072,53.304 88.072,98.104 ; 121.831,53.304 122.781,53.304 125.281,53.304 ; 121.831,98.104 122.781,98.104 125.281,98.104 ; 125.281,49.854 125.281,50.804 125.281,53.304 ; 125.281,56.754 125.281,55.804 125.281,53.304 ; 125.281,94.654 125.281,95.604 125.281,98.104 ; 125.281,99.104 125.281,110.693 ; 125.281,101.554 125.281,100.604 125.281,98.104 ; 128.731,53.304 127.781,53.304 125.281,53.304 ; 128.731,98.104 127.781,98.104 125.281,98.104 ; 130.081,54.454 131.281,54.454 133.781,54.454 ; 130.081,96.954 131.281,96.954 133.781,96.954 ; 133.781,50.754 133.781,51.954 133.781,54.454 ; 133.781,58.154 133.781,56.954 133.781,54.454 ; 133.781,93.254 133.781,94.454 133.781,96.954 ; 133.781,100.654 133.781,99.454 133.781,96.954 ; 137.481,54.454 136.281,54.454 133.781,54.454 ; 137.481,96.954 136.281,96.954 133.781,96.954 ; 151.434,121.068 151.434,141.782
  text "47,50" at 94.29,114.204 h0.7
  text "44,80" at 83.56,69.803 h0.7 r90
  text "42,50" at 48.064,67.577 h0.7 r90